# Altium PCB RdriveC1.PcbDoc (part 2 of 2)
Units mm, origin at the board's own origin, x right, y up, seen from the top; angles counter-clockwise.
Board outline 52.05 x 52.02 mm, 4 copper layers (Top Layer, S1, GND, Bottom Layer), stack 0.848 mm thick; 109 components, 86 nets, 393 pads, 206 vias.
Unrouted connection lines stored in the file: 2.
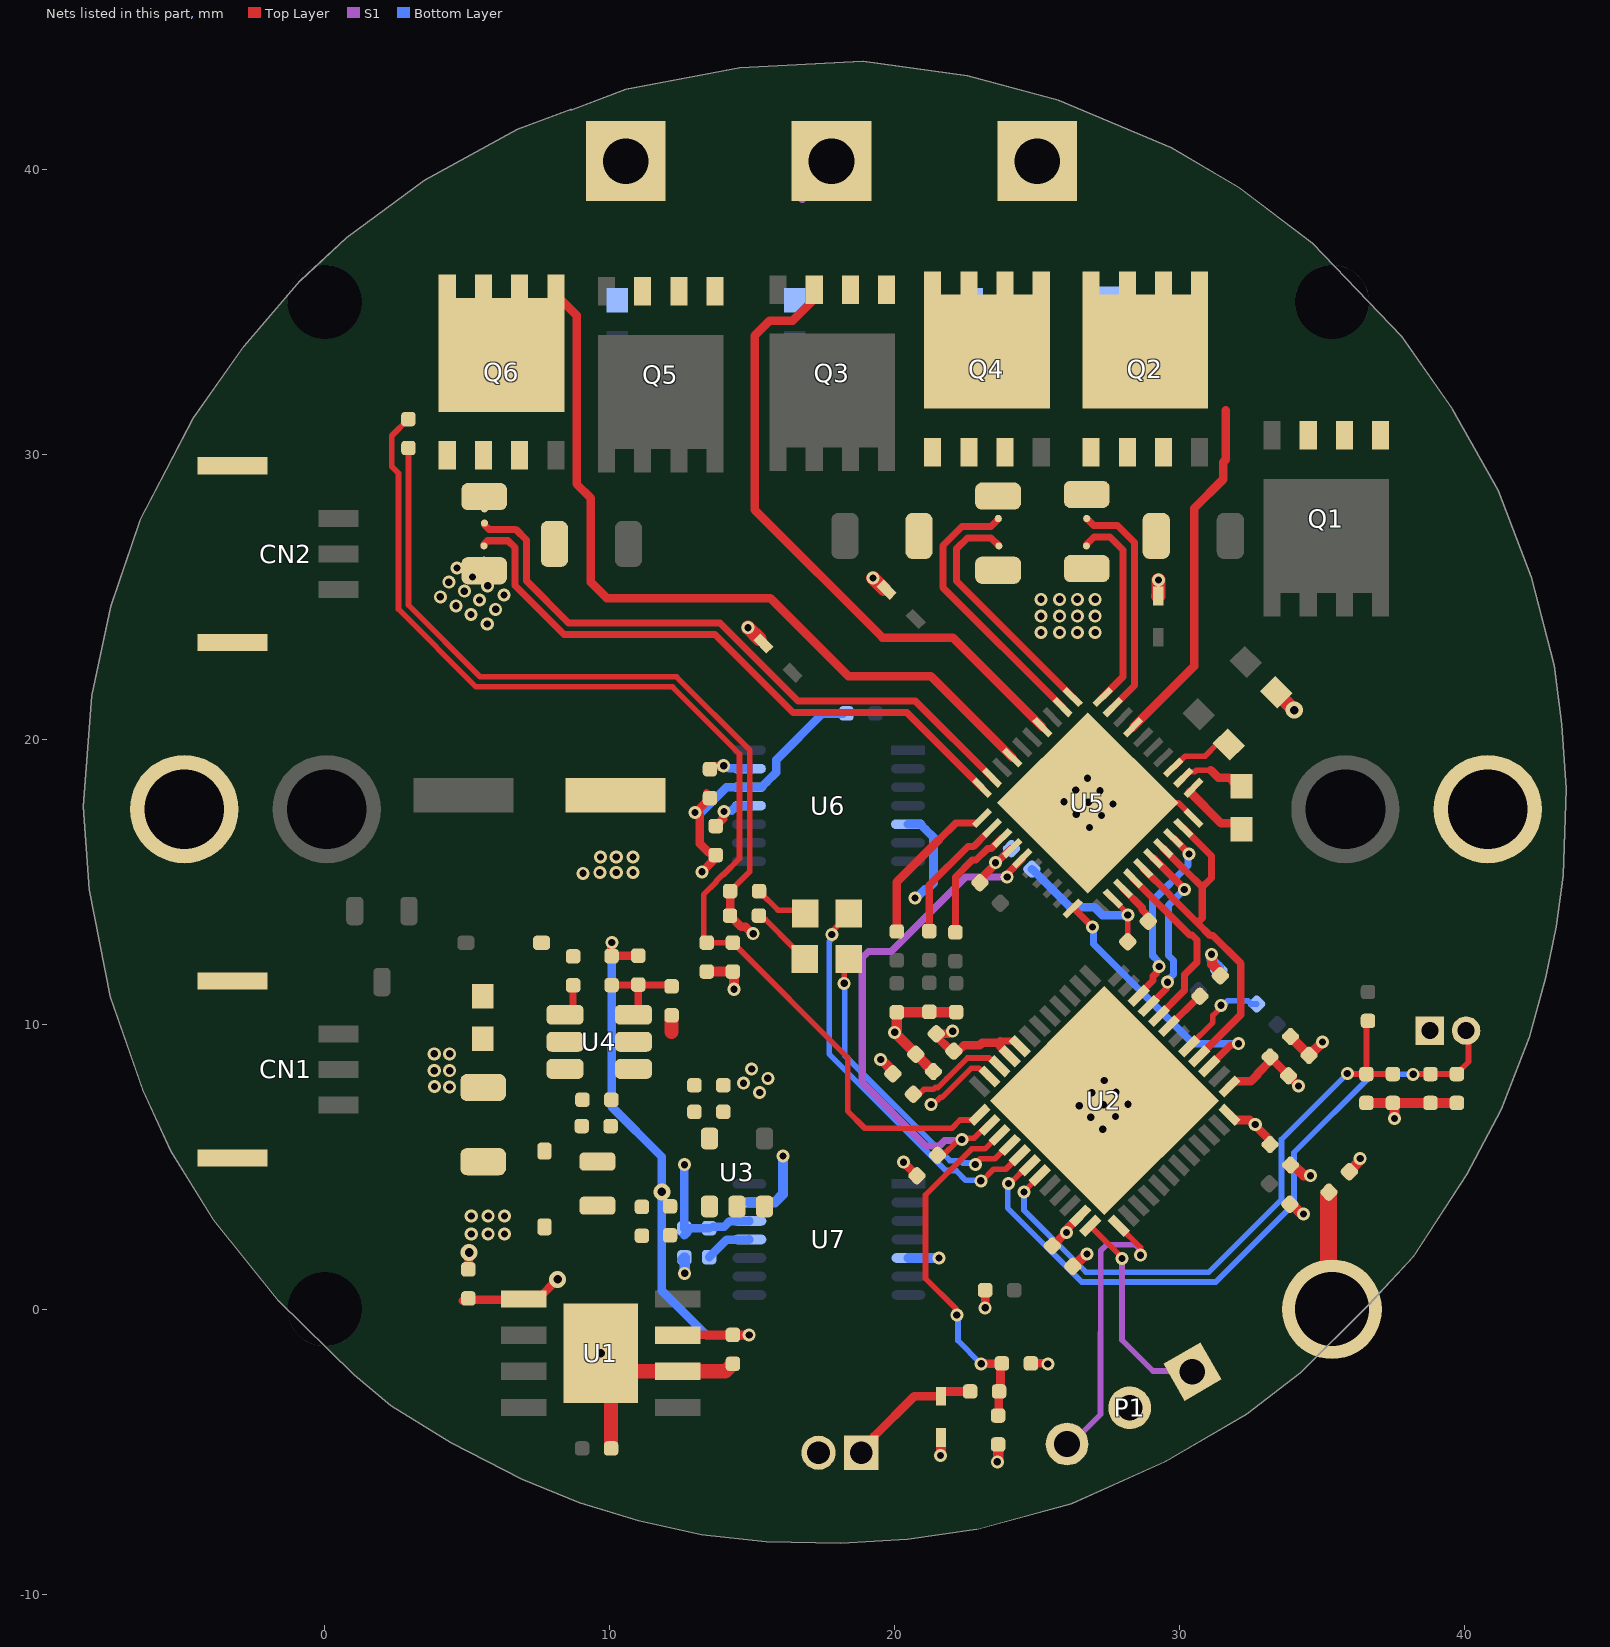
[diagram p4: the nets of this part, all layers, seen from the top]

## Via types
v1: diameter 0.457, hole 0.254, Top Layer to Bottom Layer, tented both sides, 201 vias
v2: diameter 0.6, hole 0.3, Top Layer to Bottom Layer, 4 vias
v3: diameter 0.6, hole 0.3, Top Layer to Bottom Layer, tented both sides, 1 vias

## Nets (pads, with @x,y where several pads share a name; then routed paths per layer and width w, separated by ;. In a path a pad name is that pad's centre, name@x,y a point inside that pad or via, vN(x,y) a via of type N, cw(c..) or ccw(c..) an arc to the next point about the centre after c; other vN are vias at no path point) (continued)
GND: C1.2 C2.2 C3.2 C4.1 C5.2 C6.2 C7.1 C11.1 C12.1 C14.2 C15.2 C16.1 C24.1 C25.1 C26.2 C27.2 C28.1 C29.2 C30.1 C31.1 C32.2 C37.2 C38.1 C39.1 D1.1 D3.2 P1.2 P3.2 R1.2 R6.2 R11.2 R15.2 R22.2 R29.1 R36.1 R37.2 R38.1 R39.2 U1.2 U1.9 U2.49 U3.2 U4.2 U5.32 U6.5 U6.13 U7.5 U7.13 | length 41.7
  Top Layer w0.2: U5.32@27.664,14.416 27.664,14.402 28.19,13.876 v1(28.19,13.836) v1(28.19,13.836) C24.1@28.189,12.901 ; C24.1@28.188,12.9 C24.1@28.189,12.901
  Top Layer w0.3: C3.2@5.051,1.395 5.053,1.398 5.053,1.976 v3(5.068,1.991) ; C2.2@13.521,18.956 13.625,19.06 13.875,19.06 v1@13.923,19.107
  Top Layer w0.36: C27.2@13.408,11.85 R37.2@14.323,11.85 14.365,11.809 v1(14.365,11.231) ; v1@19.533,8.766 19.94,8.358 R15.2@19.94,8.264 ; C5.2@21.365,8.342 21.359,8.342 20.751,8.949 C6.2@20.745,8.949 20.745,8.963 20.004,9.704 v1(20.004,9.719) 20.081,9.795 C31.1@20.081,10.421 20.084,10.425 22.156,10.425 C28.1@22.16,10.429 ; v1@21.63,-5.147 21.632,-5.144 21.632,-4.507 D3.2@21.635,-4.505 ; v1@23.638,-5.361 C37.2@23.638,-4.748 ; C7.1@26.258,1.503 26.297,1.503 26.732,1.938 v1(26.759,1.938) ; v1(31.124,12.456) 31.143,12.437 31.143,12.105 31.437,11.811 C16.1@31.437,11.706 ; R11.2@33.874,3.686 33.95,3.686 v1@34.264,3.372 ; C4.1@33.897,9.573 33.897,9.567 34.547,8.917 C15.2@34.547,8.911 34.555,8.911 v1(35.021,9.377) ; C14.2@33.99,5.05 34.002,5.062 34.359,4.705 34.581,4.705 v1(34.599,4.687) ; R29.1@36.003,4.884 v1@36.318,5.198 ; C26.2@36.563,7.239 R36.1@37.489,7.239 ; v1(37.549,6.692) 37.549,7.179 R36.1@37.489,7.239 ; C29.2@39.736,7.239 R36.1@37.489,7.239
  Top Layer w0.5: v2(9.687,-1.545) U1.9@10.051,-1.908 ; R38.1@10.051,-4.888 U1.9@10.051,-1.908 ; 12.171,9.741 12.171,10.313 R6.2@12.175,10.317 R6.2@12.179,10.313 ; C1.2@14.327,-1.915 14.062,-2.18 U1.2@12.387,-2.18 10.322,-2.18 U1.9@10.051,-1.908 ; C24.1@28.182,12.9 C24.1@28.188,12.9
  Bottom Layer w0.3: v1@14.099,19.022 14.142,19.022 14.183,18.98 14.883,18.98 U6.13@14.89,18.972 ; U6.5@20.473,17.022 20.908,17.022 21.087,16.842 21.091,16.842 21.367,16.567 21.367,14.953 21.155,14.741 21.067,14.741 20.758,14.433 v1(20.716,14.433) ; C25.1@24.821,15.449 26.154,14.116 27.011,14.116 27.29,13.836 v1(28.19,13.836)
  Bottom Layer w0.36: C32.2@12.547,1.743 C32.2@12.621,1.817 12.632,1.806 v1(12.632,1.259) ; U7.13@14.905,3.749 14.915,3.758 15.805,3.758 16.082,4.035 v1@16.082,5.373 ; U7.5@20.488,1.799 v1(21.565,1.799) ; v1(31.124,12.456) 31.124,12.265 31.385,12.005 R1.2@31.385,11.9
  other v1: 23.608,-5.358 21.613,-5.137 5.143,2.641 5.735,2.641 6.31,2.641 5.143,3.27 5.735,3.27 6.31,3.27 34.355,3.345 36.344,5.289 16.084,5.375 27.309,6.317 26.89,6.736 27.754,6.762 26.483,7.142 27.335,7.181 28.19,7.197 26.924,7.597 27.771,7.616 27.364,8.023 19.513,8.766 14.001,19.076
LED1_1: LED1.C U2.28 | length 11.1
  Top Layer w0.2: v1(18.234,11.439) 18.234,12.14 LED1.C@18.388,12.294 ; v1(22.835,5.08) 22.835,5.107 23.007,5.279 23.523,5.279 24.005,5.761 U2.28@24.04,5.761
  Bottom Layer w0.2: v1@18.253,11.42 18.253,8.904 21.942,5.215 22.304,5.215 22.39,5.129 22.786,5.129 v1(22.835,5.08)
LED2_1: LED2.C U2.29 | length 14.1
  Top Layer w0.2: v1(17.799,13.155) 17.848,13.205 17.848,13.311 18.401,13.864 LED2.C@18.401,13.889 ; v1(23.03,4.505) 23.066,4.505 23.475,4.914 23.901,4.914 U2.29@24.394,5.407
  Bottom Layer w0.2: v1(17.799,13.155) 17.75,13.106 17.75,12.955 17.705,12.91 17.705,8.957 21.797,4.865 22.159,4.865 22.501,4.523 23.012,4.523 v1(23.03,4.505)
M1_GND: pad.1@35.355,0 R29.2 | length 5.7
  Top Layer w0.6: R29.2@35.236,3.962 35.236,0.665 34.571,0 pad.1@35.355,0 pad.1@35.825,0.469
MOTOR1_1: U2.8 U5.34 | length 6.4
  Top Layer w0.25: U5.34@28.371,15.123 30.363,13.13 30.444,13.13 30.621,12.954 30.621,12.176 30.183,11.738 30.183,11.196 U2.8@29.279,10.292
MOTOR2_1: U2.9 U5.36 | length 6.3
  Top Layer w0.25: U2.9@28.926,10.646 29.541,11.261 29.541,11.441 v1(29.58,11.48) ; U5.36@29.078,15.83 29.099,15.83 30.17,14.76 v1(30.17,14.734)
  Bottom Layer w0.25: v1(29.58,11.48) 29.58,11.536 29.791,11.747 29.791,12.241 29.614,12.418 29.614,14.178 v1(30.17,14.734)
MOTOR3_1: U2.10 U5.38 | length 6.7
  Top Layer w0.25: U2.10@28.572,10.999 28.572,11.038 29.077,11.543 29.077,11.687 29.202,11.813 29.202,11.892 29.287,11.977 v1(29.287,12.033) ; U5.38@29.785,16.537 29.785,16.535 30.335,15.985 v1(30.335,15.982)
  Bottom Layer w0.25: v1(29.287,12.033) 29.248,12.073 29.248,12.219 29.06,12.407 29.06,14.336 30.301,15.577 30.301,15.948 v1(30.335,15.982)
MOTOR_ENABLE_1: U2.3 U5.30 | length 9.5
  Top Layer w0.25: U5.30@26.25,14.062 26.265,14.078 26.286,14.078 v1(26.947,13.417) ; U2.3@31.047,8.524 31.802,9.279 32.035,9.279 v1(32.075,9.319)
  Bottom Layer w0.25: v1(26.947,13.417) 26.987,13.377 26.987,12.819 30.488,9.319 v1(32.075,9.319)
MOTOR_FAULT_1: R31.1 U2.26 U5.25 | length 18.4
  Top Layer w0.2: R31.1@21.505,5.402 21.699,5.402 22.206,5.909 22.31,5.909 v1(22.36,5.958) 22.451,5.867 22.589,6.005 22.797,6.005 23.259,6.468 U2.26@23.333,6.468
  Top Layer w0.25: v1(23.955,15.169) 23.994,15.209 23.994,15.321 24.482,15.809 U5.25@24.482,15.83
  S1 w0.25: v1(22.36,5.958) 22.32,5.918 21.764,5.918 21.571,5.725 21.104,5.725 18.866,7.963 18.866,12.342 19.081,12.557 19.884,12.557 22.497,15.169 v1(23.955,15.169)
MOTOR_HIZ_1: U2.4 U5.35 U5.37 U5.39 | length 14.6
  Top Layer w0.25: U5.35@28.725,15.476 29.666,14.535 29.666,14.525 30.633,13.558 ; U5.37@29.432,16.184 29.432,16.174 30.206,15.399 30.216,15.399 30.801,14.814 ; U5.39@30.139,16.891 31.127,15.902 31.127,15.14 30.801,14.814 ; U2.4@30.693,8.878 32.152,10.336 32.152,12.14 31.181,13.111 31.08,13.111 30.633,13.558 ; 30.633,13.558 30.801,13.726 30.801,14.814
NetC8_1: C8.1 C10.1 D1.2 L1.1 U4.6
NetC8_2: C8.2 C10.2 U4.1
NetC9_2: C9.2 R4.2 R6.1 U4.3 | length 3.1
  Top Layer w0.25: R4.2@10.069,11.375 10.074,11.38 C9.2@11.005,11.38 ; U4.3@10.834,10.336 11.005,10.507 C9.2@11.005,11.38 ; C9.2@11.005,11.393 C9.2@11.005,11.38 ; R6.1@12.028,11.385 12.023,11.38 C9.2@11.005,11.38
NetC13_1: C13.1 D2.2 R10.2 U4.5
NetC17_2: C17.2 NT1.2 Q2.1 Q2.2 Q2.3 R28.2
NetC18_2: C18.2 NT3.2 Q4.1 Q4.2 Q4.3 R18.2
NetC19_2: C19.2 NT5.2 Q6.1 Q6.2 Q6.3 R19.2
NetC20_1: C20.1 U5.2 | length 2.5
  Top Layer w0.2: U5.2@30.139,18.658 30.344,18.863 30.542,18.863 30.594,18.915 31.103,18.915 ; C20.1@32.178,18.355 C20.1@32.361,18.538
  Top Layer w0.3: 31.103,18.915 31.361,18.658 31.744,18.658 31.974,18.428 C20.1@31.974,18.378
NetC20_2: C20.2 U5.1 | length 2.5
  Top Layer w0.2: U5.1@30.362,18.16 30.438,18.236 30.438,18.25 U5.1@30.492,18.305 ; C20.2@32.178,16.855 C20.2@32.424,16.61
  Top Layer w0.3: U5.1@30.362,18.16 31.462,17.06 C20.2@31.873,17.06
NetC21_1: C21.1 U5.3 | length 2.5
  Top Layer w0.2: U5.3@29.785,19.012 29.799,19.012 30.201,19.414 30.904,19.414 31.324,19.834 31.72,19.834 C21.1@31.732,19.821
  Top Layer w0.25: C21.1@31.623,20.008 31.732,20.008 31.734,20.008 C21.1@31.769,19.973
NetC24_2: C24.2 U5.33 | length 1.6
  Top Layer w0.25: U5.33@28.018,14.769 28.693,14.094 28.693,14.012 29.013,13.692 C24.2@29.013,13.547
NetC37_1: C37.1 R12.2 R13.1 U2.27 | length 12.8
  Top Layer w0.2: v1(22.187,-0.206) 22.138,-0.157 22.138,0.031 21.086,1.083 21.086,4.008 22.707,5.629 23.173,5.629 23.659,6.114 U2.27@23.687,6.114
  Top Layer w0.3: v1@23.044,-1.914 R12.2@23.758,-1.914 ; C37.1@23.638,-3.732 23.654,-3.715 23.654,-2.904 R13.1@23.67,-2.888 23.72,-2.838 23.72,-1.952 R12.2@23.758,-1.914 ; R12.2@23.769,-1.903 R12.2@23.758,-1.914
  Bottom Layer w0.2: v1@22.224,-0.219 22.224,-1.102 v1(23.04,-1.918)
NetCN1_4: CN1.4 CN1.5
NetCN2_4: CN2.4 CN2.5
NetD3_1: D3.1 P3.1 R13.2 | length 5
  Top Layer w0.3: P3.1@18.686,-5.061 18.807,-5.061 19.279,-4.588 19.279,-4.467 20.69,-3.057 D3.1@21.635,-3.057 21.635,-2.916 21.662,-2.888 R13.2@22.654,-2.888
NetLED1_A: LED1.A R7.2 | length 2.3
  Top Layer w0.2: R7.2@15.241,13.813 15.378,13.676 15.467,13.676 16.458,12.684 16.483,12.684 16.848,12.319 LED1.A@16.848,12.294
NetLED2_A: LED2.A R9.2 | length 1.9
  Top Layer w0.2: R9.2@15.244,14.673 15.91,14.007 16.743,14.007 LED2.A@16.861,13.889
NetR2_2: R2.2 U2.5 | length 3.3
  Top Layer w0.2: U2.5@30.34,9.232 31.174,10.066 31.174,10.308 31.463,10.596 v1(31.463,10.666)
  Bottom Layer w0.2: v1(31.463,10.666) 31.532,10.666 31.696,10.829 32.399,10.829 32.515,10.713 R2.2@32.709,10.713
NetR3_2: R3.2 U7.11 | length 1.7
  Bottom Layer w0.3: R3.2@13.49,1.827 14.104,2.441 14.897,2.441 U7.11@14.905,2.449
NetR10_1: R10.1 U4.4 | length 1.2
  Top Layer w0.25: U4.4@8.434,10.336 8.497,10.336 8.718,10.557 R10.1@8.718,11.368
NetR15_1: R15.1 U2.22 | length 3.7
  Top Layer w0.2: R15.1@20.659,7.545 20.853,7.545 21.024,7.716 21.365,7.716 21.434,7.785 21.521,7.785 21.838,8.103 21.842,8.103 22.555,8.816 23.321,8.816 23.613,8.524 U2.22@23.687,8.524
NetR32_2: R32.2 U5.23 | length 4.1
  Top Layer w0.25: R32.2@22.136,13.23 22.136,15.174 22.726,15.763 22.86,15.763 23.273,16.176 23.393,16.176 23.754,16.537 U5.23@23.775,16.537
NetR35_2: R35.2 U5.22 | length 4.4
  Top Layer w0.25: R35.2@21.22,13.269 21.22,14.886 22.58,16.246 22.777,16.246 U5.22@23.227,16.696
NetR40_2: R40.2 U5.21 | length 5.4
  Top Layer w0.25: 21.548,16.46 22.148,17.06 U5.21@22.863,17.06
  Top Layer w0.3: R40.2@20.078,13.258 20.078,14.99 21.548,16.46
NetR41_2: R41.2 U6.11 | length 1.3
  Top Layer w0.3: R41.2@13.725,16.957 13.987,17.219 13.987,17.436 v1(14.017,17.466)
  Bottom Layer w0.3: 14.28,17.496 14.456,17.672 U6.11@14.89,17.672
nRST_1: C16.2 U2.7 | length 1.5
  Top Layer w0.25: U2.7@29.633,9.939 29.651,9.939 30.7,10.988 C16.2@30.719,10.988
PGND: C13.2 C22.2 C23.2 C33.1 C34.1 C35.1 C36.1 D6.2 D7.2 D8.2 NT2.2 NT4.2 NT6.2 P5.1 P6.1 R18.1 R19.1 R22.1 R28.1 U5.40 U5.41 | length 6.5
  Top Layer w0.2: U5.41@26.78,17.775 29.962,17.775 U5.40@30.492,17.244
  Top Layer w0.5: v1(14.86,23.922) D8.2@15.249,23.532 ; v1@19.241,25.668 D7.2@19.633,25.277 ; D6.2@29.255,25.034 29.266,25.046 v1@29.266,25.6 ; C22.2@33.393,21.658 34.022,21.028 v2@34.039,21.028
  other v1: 4.387,7.796 3.85,7.82 3.843,8.371 4.387,8.371 3.843,8.964 4.387,8.964 9.069,15.3 9.656,15.333 10.231,15.333 10.824,15.333 9.68,15.87 10.231,15.876 10.824,15.876 26.844,16.911 27.263,17.33 26.381,17.374 27.67,17.737 26.8,17.793 25.945,17.81 27.207,18.2 26.364,18.229 26.771,18.635 25.142,23.75 25.797,23.75 26.414,23.75 27.043,23.75 5.704,24.054 25.142,24.325 25.797,24.325 26.414,24.325 27.043,24.325 5.137,24.381 6,24.567 4.603,24.69 5.433,24.894 25.142,24.918 25.797,24.918 26.414,24.918 27.043,24.918 4.058,25.004 6.288,25.065 4.899,25.203 5.72,25.393 4.354,25.517 29.266,25.597 19.243,25.667 5.187,25.701 4.642,26.016
  other v2: 34.03,21.028
SH_A_1: A.1 Q1.1 Q1.2 Q1.3 Q2.5 U5.7 | length 15.1
  Top Layer w0.3: U5.7@28.371,20.426 30.515,22.57 30.515,28.108 31.541,29.134 31.541,29.733 31.623,29.815 31.623,31.555 ; Q2.5@28.806,33.608 Q2.5@30.656,31.758
SH_B_1: B.1 Q3.1 Q3.2 Q3.3 Q4.5 U5.14 | length 23.7
  Top Layer w0.3: Q3.3@17.159,35.433 16.425,34.699 15.617,34.699 15.088,34.17 15.088,28.061 19.577,23.572 20.724,23.572 20.729,23.568 22.048,23.568 U5.14@25.189,20.426
  S1 w0.3: B.1@16.755,38.984 17.808,40.037 B.1@17.808,40.299
SH_C_1: C.1 Q5.1 Q5.2 Q5.3 Q6.5 U5.17 | length 28.1
  Top Layer w0.3: Q6.5@8.111,35.816 8.111,35.616 8.318,35.408 8.84,34.887 8.84,28.967 9.343,28.464 9.343,25.515 9.898,24.96 15.638,24.96 18.376,22.222 20.165,22.222 20.169,22.218 21.276,22.218 U5.17@24.128,19.365
SN1_1: NT2.1 U5.10 | length 7
  Top Layer w0.25: NT2.1@26.734,26.841 27,27.107 27.564,27.107 28.022,26.648 28.022,22.198 U5.10@27.31,21.487
SN2_1: NT4.1 U5.11 | length 8.6
  Top Layer w0.25: NT4.1@23.639,26.823 23.391,27.071 22.555,27.071 22.177,26.692 22.177,25.56 U5.11@26.25,21.487
SN3_1: NT6.1 U5.20 | length 22
  Top Layer w0.25: NT6.1@5.588,26.793 5.588,26.848 5.714,26.974 6.437,26.974 6.677,26.734 6.677,25.401 8.393,23.685 13.703,23.685 16.441,20.947 19.637,20.947 19.641,20.943 20.43,20.943 U5.20@23.068,18.305
SP1_1: NT1.1 U5.9 | length 8.1
  Top Layer w0.25: NT1.1@26.745,27.755 26.994,27.507 27.829,27.507 28.422,26.914 28.422,21.892 U5.9@27.664,21.133
SP2_1: NT3.1 U5.12 | length 9.7
  Top Layer w0.25: NT3.1@23.65,27.736 23.385,27.471 22.821,27.471 22.369,27.471 21.703,26.805 21.703,25.326 U5.12@25.896,21.133
SP3_1: NT5.1 U5.19 | length 22.4
  Top Layer w0.25: NT5.1@5.606,27.591 5.606,27.528 5.76,27.374 6.701,27.374 7.077,26.998 7.077,25.566 8.558,24.085 13.869,24.085 16.607,21.347 19.803,21.347 19.807,21.343 20.737,21.343 U5.19@23.421,18.658
SWCLK_1: P1.3 U2.37 | length 10.5
  Top Layer w0.2: U2.37@27.865,2.932 28.631,2.166 v1(28.631,1.897)
  S1 w0.2: P1.3@26.03,-4.708 26.214,-4.708 27.23,-3.692 27.23,-0.82 27.237,-0.813 27.237,2.058 27.438,2.259 28.465,2.259 28.582,2.142 28.582,1.946 v1(28.631,1.897)
SWDIO_1: P1.1 U2.36 | length 7.4
  Top Layer w0.2: U2.36@26.869,2.932 26.869,2.926 27.985,1.81 v1(27.985,1.781)
  S1 w0.2: v1(27.985,1.781) 27.985,-1.082 29.071,-2.168 P1.1@30.43,-2.168
VBAT_SENSE_1: C26.1 R33.1 R36.2 U2.31 | length 21.3
  Top Layer w0.2: v1(24.545,4.116) 24.545,4.13 25.101,4.686 U2.31@25.101,4.7 ; v1@35.867,8.255 C26.1@36.563,8.255 R36.2@37.489,8.255 ; C26.1@36.563,8.255 36.564,10.064 R33.1@36.618,10.118
  Bottom Layer w0.2: v1@24.511,4.075 24.545,4.04 24.545,3.475 26.718,1.302 31.033,1.302 33.585,3.854 33.585,5.961 v1(35.894,8.27)
VCC: C2.1 C3.1 C4.2 C5.1 C6.1 C7.2 C14.1 C15.1 C25.2 C32.1 C38.2 C39.2 P2.1 R3.1 R5.1 R7.1 R8.1 R9.1 R12.1 R30.2 R31.2 R34.2 R41.1 U1.5 U2.1 U2.20 U2.21 U2.23 U2.35 U2.48 U3.5 U5.24 U6.12 U7.12 | length 64.1
  Top Layer w0.2: R34.2@2.936,30.228 2.936,24.717 5.458,22.195 12.35,22.195 14.915,19.63 14.915,15.36 R9.1@14.228,14.673 ; C2.1@13.399,18.16 13.399,18.061 C2.1@13.521,17.94 ; v1(21.285,7.183) 21.354,7.183 21.606,7.435 21.669,7.435 22.697,8.462 22.968,8.462 23.259,8.171 U2.23@23.333,8.171
  Top Layer w0.25: v1(23.54,15.673) 23.58,15.712 23.636,15.712 24.107,16.184 U5.24@24.128,16.184 ; 23.644,9.35 23.705,9.411 24.214,9.411 U2.20@24.394,9.232
  Top Layer w0.3: C3.1@4.853,0.296 4.885,0.328 6.955,0.328 U1.5@6.987,0.36 7.483,0.36 v2(8.172,1.05) ; v1(12.996,17.432) 13.014,17.432 C2.1@13.521,17.94 ; v1@13.145,17.368 13.161,17.353 13.161,16.343 13.459,16.045 13.621,16.045 R41.1@13.725,15.941 13.621,15.837 13.621,15.732 v1(13.24,15.351) ; R9.1@14.228,14.673 14.226,14.672 14.226,13.815 R7.1@14.225,13.813 14.617,13.42 14.775,13.42 15.004,13.192 v1@15.11,13.192 ; v1(20.31,5.161) 20.31,5.159 R31.2@20.786,4.683 ; C6.1@21.423,9.627 21.99,9.06 C5.1@22.083,9.06 22.23,9.06 22.429,9.259 22.989,9.259 23.08,9.35 23.644,9.35 ; C6.1@21.464,9.667 21.908,9.667 21.998,9.757 v1(22.04,9.757) ; R30.2@22.997,14.969 22.997,15.087 23.54,15.63 v1(23.54,15.673) ; v1(23.182,0.049) R5.1@23.182,0.668 ; 23.705,9.411 23.705,9.217 24.04,8.881 U2.21@24.04,8.878 ; R12.1@24.785,-1.903 v1@25.402,-1.903 ; C7.2@25.54,2.221 25.552,2.221 26.022,2.691 v1(26.034,2.691) 26.065,2.721 26.065,2.832 26.515,3.282 U2.35@26.515,3.286 ; U2.48@31.754,6.821 31.758,6.821 31.937,6.642 32.465,6.642 33.179,5.927 C14.1@33.179,5.78 ; U2.1@31.754,7.817 31.934,7.997 32.506,7.997 32.755,8.246 32.755,8.283 33.179,8.707 C4.2@33.179,8.848 ; C4.2@33.179,8.854 C4.2@33.179,8.848 ; v1(34.182,7.833) 33.829,8.187 C15.1@33.829,8.192 33.829,8.199 C4.2@33.179,8.848
  Bottom Layer w0.25: v1(23.54,15.673) 23.574,15.673 24.068,16.168 C25.2@24.102,16.168
  Bottom Layer w0.3: C32.1@12.617,2.588 C32.1@12.725,2.696 ; C32.1@12.621,2.833 12.621,5.071 v1(12.623,5.073) ; C32.1@12.626,2.838 13.485,2.838 R3.1@13.49,2.843 ; v1@13.145,17.368 14.091,18.314 14.883,18.314 U6.12@14.89,18.322 15.325,18.322 15.505,18.502 15.509,18.502 15.846,18.838 15.846,19.281 17.47,20.906 R8.1@18.206,20.906 ; R3.1@13.634,2.888 14.015,2.888 14.217,3.091 14.897,3.091 U7.12@14.905,3.099
  other v1: 25.379,-1.924 32.661,6.482 15.266,7.606 14.698,7.934 15.553,8.105 14.986,8.432 15.038,13.18
VCC_5V: C1.1 C9.1 C11.2 C12.2 L1.2 R4.1 U1.3 U3.1 U3.3 | length 20.6
  Top Layer w0.3: v1(10.076,12.868) 10.076,12.398 10.078,12.4 10.996,12.4 C9.1@11.005,12.409 ; U1.3@12.387,-0.91 12.393,-0.904 14.321,-0.904 C1.1@14.327,-0.899 14.332,-0.903 14.891,-0.903 v1(14.896,-0.908)
  Bottom Layer w0.3: v1(10.076,12.868) 10.076,7.104 11.833,5.347 v2(11.833,4.116) 11.833,0.65 13.391,-0.908 v1(14.896,-0.908)
VTEMP_FET_1: C27.1 R34.1 R37.1 U2.25 | length 41.9
  Top Layer w0.2: R34.1@2.936,31.244 2.35,30.658 2.35,29.578 2.586,29.342 2.586,26.337 2.586,24.572 5.313,21.845 12.205,21.845 14.558,19.492 14.558,15.818 13.987,15.247 13.96,15.247 13.739,15.026 13.739,15 13.298,14.558 13.298,12.976 C27.1@13.408,12.866 R37.1@14.323,12.866 18.354,8.836 18.354,6.955 18.954,6.355 22.012,6.355 22.299,6.642 22.726,6.642 22.906,6.821 U2.25@22.98,6.821
VTEMP_MOT_1: C29.1 P2.2 R39.1 U2.30 | length 24.5
  Top Layer w0.2: v1(24.001,4.412) 24.053,4.412 24.695,5.053 U2.30@24.748,5.053 ; v1@38.275,8.255 R39.1@38.812,8.255 C29.1@39.736,8.255 39.736,8.269 40.148,8.681 40.148,9.692 P2.2@40.061,9.779
  Bottom Layer w0.2: v1@23.969,4.425 23.969,3.556 26.573,0.952 31.275,0.952 34.022,3.699 34.022,5.495 36.77,8.243 v1(38.203,8.243)
pads on no net: U2.16 U2.24 U3.4 U5.31 U6.6 U6.7 U6.8 U6.9 U6.10 U6.14 U7.6 U7.7 U7.8 U7.9 U7.10 U7.14

## Polygon pours and split planes (outlines as drawn)
DCBUS on Top Layer "NONET_L01_P-001" (solid, pour order 127): 4.048,15.982 -1.164,15.982 -1.763,16.581 -1.763,18.376 -0.198,19.942 6.25,19.942 6.466,19.726 6.466,15.096 5.718,14.349 5.681,14.349
DCBUS on Top Layer "NONET_L01_P-001" (solid, pour order 118): 4.048,15.982 4.048,12.429 4.248,12.23 5.469,12.23 5.718,12.479 5.718,14.349 6.276,14.906 6.276,15.885 5.344,16.817 4.609,16.081 3.998,16.081
GND on Top Layer "NONET_L01_P-001" (solid, pour order 90): 4.841,6.398 6.362,6.398 6.555,6.206 6.555,3.967 6.897,3.624 7.926,3.624 8.129,3.421 8.129,3.163 8.333,2.96 14,2.96 14.16,3.12 14.16,3.853 14.256,3.949 14.664,3.949 14.783,3.83 14.783,2.95 14.963,2.771 16.495,2.771 16.624,2.901 16.624,8.467 15.825,9.267 13.445,9.267 13.263,9.085 13.263,6.758 13.093,6.587 12.307,6.587 12.218,6.676 12.218,8.751 11.996,8.974 10.187,8.974 10.009,9.152 10.009,9.633 10.224,9.848 16.517,9.848 17.547,8.818 17.547,2.214 17.199,1.866 6.778,1.866 6.541,2.103 4.732,2.103 4.421,2.414 4.421,6.165 4.658,6.402 5.288,6.402
PGND on Top Layer "NONET_L01_P-001" (solid, pour order 116): 4.619,9.994 3.745,9.994 3.52,9.769 3.52,7.475 4.045,6.95 4.677,6.95 4.677,9.936
PGND on Top Layer "NONET_L01_P-001" (solid, pour order 107): 7.833,14.33 8.002,14.16 11.601,14.16 11.862,14.422 11.862,19.727 11.678,19.912 8.049,19.912 7.833,19.696
PGND on Top Layer "NONET_L01_P-001" (solid, pour order 104): 4.76,27.041 6.533,27.041 6.789,26.784 6.789,24.042 6.488,23.741 4.827,23.741 3.578,24.989 3.578,26.673 3.957,27.052 4.894,27.052
NetC19_2 on Top Layer "NONET_L01_P-001" (solid, pour order 103): 7.181,30.868 7.5,30.549 7.5,28.847 8.563,27.784 8.563,26.136 7.5,26.136 6.33,27.306 4.044,27.306 3.725,27.625 3.725,30.562 4.031,30.868
DCBUS on Top Layer "NONET_L01_P-001" (solid, pour order 102): 10.165,26.213 10.165,30.391 10.642,30.869 13.123,30.869 13.972,30.02 13.972,26.412 13.627,26.067 10.39,26.067 10.178,26.28
PGND on Top Layer "NONET_L01_P-001" (solid, pour order 101): 22.843,26.833 27.418,26.833 27.642,26.609 27.642,22.602 27.382,22.342 26.082,22.342 22.761,25.663 22.761,26.668 22.938,26.845
DCBUS on Top Layer "NONET_L01_P-001" (solid, pour order 100): 18.899,28.998 19.14,29.239 19.717,29.239 19.99,29.512 19.99,30.33 19.728,30.592 15.878,30.592 15.637,30.351 15.637,28.641 17.808,26.47 18.899,26.47
NetC18_2 on Top Layer "NONET_L01_P-001" (solid, pour order 99): 20.379,26.582 20.379,28.735 20.58,28.937 20.58,30.498 20.971,30.889 24.169,30.889 24.622,30.435 24.622,29.252 24.874,29 24.874,27.463 24.748,27.338 22.469,27.338 21.361,26.229 20.706,26.229 20.706,26.267 20.391,26.582
NetC17_2 on Top Layer "NONET_L01_P-001" (solid, pour order 98): 25.53,28.979 26.014,29.463 26.014,30.833 26.36,31.179 29.75,31.179 30.013,30.916 30.013,26.723 29.57,26.28 28.892,26.28 28.602,26.571 28.602,27.332 28.297,27.637 25.793,27.637 25.516,27.913 25.53,27.927 25.53,28.315
DCBUS on Top Layer "NONET_L01_P-001" (solid, pour order 97): 31.491,23.322 31.491,27.885 31.749,28.143 33.458,28.143 33.678,27.923 33.678,24.097 33.006,23.424 31.593,23.424
DCBUS on Top Layer "NONET_L01_P-001" (solid, pour order 96): 28.74,19.501 31.491,22.252 31.491,23.514 31.611,23.634 32.735,23.634 32.903,23.466 32.903,22.009 30.476,19.582 29.817,19.582 29.269,19.035 29.113,19.035 28.734,19.414 28.734,19.514
SH_A_1 on Top Layer "NONET_L01_P-001" (solid, pour order 95): 26.571,31.654 26.571,36.695 25.673,37.593 22.441,37.593 21.869,38.165 21.869,41.447 22.647,42.225 25.696,42.225 25.953,41.968 26.571,41.968 27.33,41.21 28.485,41.21 29.08,40.615 29.721,40.615 30.457,39.88 30.783,39.88 31.728,38.935 31.728,34.918 34.063,32.584 37.426,32.584 37.889,32.121 37.889,30.02 37.656,29.787 34.12,29.787 33.864,30.044 33.864,31.036 33.572,31.327 31.227,31.327 30.912,31.642 26.641,31.642 26.618,31.619
SH_B_1 on Top Layer "NONET_L01_P-001" (solid, pour order 94): 16.874,36.337 16.396,36.814 15.399,36.814 15.047,37.166 15.047,41.716 15.657,42.325 20.368,42.325 20.99,41.703 20.99,37.404 21.397,36.997 25.373,36.997 25.569,36.8 25.569,31.729 25.429,31.589 20.582,31.589 20.4,31.771 20.4,34.286 20.175,34.511 17.253,34.511 16.874,34.89 16.874,35.494
SH_C_1 on Top Layer "NONET_L01_P-001" (solid, pour order 93): 3.986,31.562 3.986,38.992 5.332,40.338 6.254,40.338 7.084,41.168 7.95,41.168 8.78,41.997 13.572,41.997 14.065,41.504 14.065,34.996 13.953,34.885 10.818,34.885 10.609,35.094 10.609,36.25 10.288,36.571 8.741,36.571 8.449,36.278 8.449,31.624 8.337,31.512 4.087,31.512 4.017,31.582
PGND on Top Layer "NONET_L01_P-001" (solid, pour order 92): 5.04,9.977 6.001,9.977 6.212,9.766 6.212,8.747 6.599,8.359 6.599,7.171 6.363,6.935 4.577,6.935 4.324,7.188 4.324,9.699 4.619,9.994 5.403,9.994
VCC on Top Layer "NONET_L01_P-001" (solid, pour order 89): 13.036,5.549 13.036,6.233 13.487,6.685 13.487,8.748 13.648,8.908 15.646,8.908 15.896,8.658 15.896,6.702 15.836,6.642 14.544,6.642 14.418,6.516 14.418,5.462 14.305,5.35 13.226,5.35 13.027,5.549
VCC_5V on Top Layer "NONET_L01_P-001" (solid, pour order 88): 13.549,4.471 15.898,4.471 16.048,4.321 16.048,3.218 15.87,3.04 15.213,3.04 15.052,3.202 15.052,4.09 15.068,4.106 13.981,4.106 13.782,3.907 13.636,4.052 13.13,4.052
VCC_5V on Top Layer "NONET_L01_P-001" (solid, pour order 87): 8.635,3.203 12.687,3.203 12.851,3.04 13.897,3.04 13.976,3.118 13.954,3.139 13.954,4.065 13.549,4.471 11.22,4.471 10.899,4.151 8.82,4.151 8.635,3.965 8.635,3.317 8.763,3.189
NetC8_2 on Top Layer "NONET_L01_P-001" (solid, pour order 86): 9.774,6.209 9.774,8.618 9.929,8.773 11.463,8.773 11.633,8.603 11.633,6.294 11.548,6.209 9.805,6.209 9.743,6.27
NetC8_1 on Top Layer "NONET_L01_P-001" (solid, pour order 85): 7.845,8.781 9.231,8.781 9.441,8.572 9.441,5.93 9.541,5.829 9.549,5.837 10.44,5.837 10.587,5.689 10.587,4.713 10.308,4.434 7.326,4.434 7.078,4.682 7.078,8.347 7.519,8.788 9.03,8.788
NetC13_1 on Top Layer "NONET_L01_P-001" (solid, pour order 84): 5.468,10.378 6.079,10.378 6.577,9.88 6.577,9.127 6.771,8.932 9.078,8.932 9.258,9.112 9.258,9.681 9.108,9.831 7.677,9.831 7.483,10.026 7.483,11.471 7.857,11.845 9.078,11.845 9.288,12.055 9.288,13.456 9.1,13.643 6.899,13.643 6.577,13.321 6.577,12.482 5.783,11.688 5.176,11.688 5.004,11.516 5.004,10.67 5.311,10.363 5.326,10.378 5.581,10.378
PGND on S1 "NONET_L01_P-001" (solid, pour order 82): 42.827,12.757 41.579,11.509 33.651,11.509 31.802,13.358 31.802,17.224 31.046,17.98 29.589,17.98 29.589,21.538 31.522,23.471 42.079,23.471 42.827,22.723
PGND on S1 "NONET_L01_P-001" (solid, pour order 80): -1.748,17.674 -7.034,17.674 -7.389,18.029 -7.389,21.737 -7.389,24.183 -6.127,25.445 -6.127,27.457 -1.985,31.599 1.526,31.599 3.498,33.571 3.498,36.293 4.248,37.042 30.796,37.042 32.058,35.78 32.058,34.715 34.346,32.427 37.778,32.427 40.578,29.626 40.578,27.26 42.156,25.682 42.156,23.394 42.827,22.723 42.827,14.045 42.117,13.335 36.989,13.335 36.121,14.203 36.121,17.122 36.555,17.556 38.172,17.556 38.685,18.068 38.685,20.751 38.054,21.382 33.281,21.382 26.646,14.747 26.071,14.747 26.071,14.871 20.276,20.665 13.577,20.665 12.29,19.378 12.29,14.354 11.99,14.053 4.589,14.053 3.446,15.197 3.446,16.581 2.453,17.573 -1.819,17.573 -1.97,17.724
GND on S1 "NONET_L01_P-001" (solid, pour order 113): 3.207,-3.537 3.207,-2.561 4.448,-1.32 4.448,6.348 4.506,6.407 7.025,6.407 7.533,6.914 7.533,8.766 8.737,9.969 8.737,11.832 9.732,12.828 12.157,12.828 13.084,13.755 13.084,18.844 14.307,20.067 19.894,20.067 25.826,14.135 27.043,14.135 29.447,16.539 30.233,16.539 31.019,15.753 31.019,13.16 33.753,10.426 41.798,10.426 42.207,10.018 42.207,8.918 41.5,8.211 41.5,7.409 40.667,6.576 40.667,5.696 39.158,4.188 38.498,4.188 37.115,2.805 34.806,2.805 34.68,2.679 33.878,2.679 32.276,1.077 32.276,-3.433 31.993,-3.716 30.956,-3.716 29.777,-4.894 28.803,-4.894 27.609,-6.089 26.367,-6.089 25.519,-6.937 23.806,-6.937 23.24,-7.503 12.539,-7.503 11.691,-6.654 9.177,-6.654 8.25,-5.727 7.103,-5.727 5.61,-4.234 4.148,-4.234 3.206,-3.292 3.206,-2.836
PGND on S1 "NONET_L01_P-001" (solid, pour order 115): 3.446,15.197 3.446,7.434 3.789,7.091 6.484,7.091 6.521,7.128 6.521,13.541 6.484,14.457 6.484,15.158 3.485,15.158
DCBUS on Bottom Layer "NONET_L01_P-001" (solid, pour order 125): 0.096,19.453 -0.688,19.453 -1.701,18.44 -1.701,16.453 -0.942,15.693 7.483,15.693 8.562,16.772 5.871,19.463 0.143,19.463
PGND on Bottom Layer "NONET_L01_P-001" (solid, pour order 124): -7.373,21.768 -7.373,15.653 -6.558,14.838 -3.773,14.838 -2.993,15.618 -2.993,17.681 -2.569,18.105 -2.569,18.689 -5.648,21.768
DCBUS on Bottom Layer "NONET_L01_P-001" (solid, pour order 108): 0.186,20.073 5.832,20.073 9.04,23.28 9.04,33.456 9.788,34.205 27.979,34.205 28.318,33.866 28.318,30.979 27.966,30.626 15.552,30.626 13.146,28.22 13.146,21.356 8.477,16.686 0.355,16.686 0.058,16.983 0.058,19.912 0.251,20.105
PGND on Bottom Layer "NONET_L01_P-001" (solid, pour order 109): 28.974,35.377 28.974,31.057 31.269,28.761 36.527,28.761 36.972,28.316 36.972,21.256 38.478,19.751 38.478,18.566 37.564,17.652 36.429,17.652 36.14,17.364 36.14,13.744 36.972,12.913 42.18,12.913 43.094,13.826 43.094,22.244 42.057,23.281 42.057,25.576 40.477,27.156 40.477,29.032 37.416,32.093 34.232,32.093 31.401,34.924 31.401,36.552 31.106,36.552 30.183,37.475 28.924,36.216 28.924,35.08
DCBUS on Bottom Layer "NONET_L01_P-001" (solid, pour order 112): 28.268,31.31 28.268,30.87 30.905,28.233 35.844,28.233 36.305,27.773 36.305,18.417 35.593,17.706 35.614,17.685 35.614,12.808 35.133,12.327 32.83,12.327 30.905,14.252 30.905,22.101 25.233,27.773 25.233,31.938 27.2,31.938 27.472,32.21 28.289,31.393 28.289,31.289
PGND on Bottom Layer "NONET_L01_P-001" (solid, pour order 105): -3.76,18.155 -7.373,21.768 -7.373,24.283 -6.115,25.541 -6.115,27.681 -2.235,31.561 0.815,31.561 3.251,33.996 3.251,36.672 4.588,38.01 30.978,38.01 31.401,37.529 31.401,35.575 31.026,35.201 8.79,35.201 7.907,34.318 7.907,24.497 4.883,21.473 0.628,21.473 -0.656,20.189 -0.656,18.664 -1.165,18.155 -2.61,18.155
PGND on Bottom Solder "NONET_L01_P-001" (solid): 26.791,14.692 21.88,19.602 21.861,19.602 25.025,22.766 25.025,22.785 29.877,17.933 29.955,17.933 26.791,14.769 26.791,14.711
PGND on Bottom Solder "NONET_L01_P-001" (solid, pour order 111): 36.429,17.652 37.564,17.652 38.425,18.513 38.425,19.886 37.007,21.305 37.007,24.192 41.815,24.192 42.023,23.984 42.023,20.456 39.893,18.326 39.893,15.17 39.18,14.458 36.025,14.458 35.98,14.502 35.98,17.204
PGND on Bottom Paste "NONET_L01_P-001" (solid): 36.426,17.663 37.562,17.663 38.423,18.524 38.423,19.897 37.005,21.315 37.005,24.203 41.813,24.203 42.021,23.994 42.021,20.467 39.89,18.336 39.89,15.18 39.178,14.468 36.023,14.468 35.978,14.513 35.978,17.214
DCBUS on GND "NONET_L01_P-001" (solid, pour order 126): -2.533,15.587 -2.231,15.285 3.953,15.285 4.403,15.735 4.403,18.308 3.395,19.315 -1.596,19.315 -2.533,18.379
DCBUS on GND "NONET_L01_P-001" (solid, pour order 81): 2.291,17.461 -7.456,17.461 -7.456,21.542 -7.321,21.677 -7.321,24.274 -6.276,25.32 -6.276,27.377 -1.891,31.762 1.92,31.762 3.674,33.516 3.674,36.214 4.585,37.124 30.724,37.124 32.208,35.64 32.208,34.527 34.4,32.335 37.84,32.335 40.606,29.569 40.606,27.175 42.225,25.556 42.225,23.06 42.562,22.723 42.562,12.672 41.719,11.829 33.287,11.829 31.702,13.414 31.702,17.293 30.96,18.035 30.049,18.035 26.879,14.864 26.069,14.864 20.302,20.632 13.354,20.632 12.511,19.788 12.511,14.696 11.769,13.954 5.023,13.954 3.64,15.336 3.64,16.247 2.527,17.36 -2.498,17.36 -2.633,17.495
VCC on GND "NONET_L01_P-001" (solid, pour order 114): 3.287,-3.517 3.287,-2.541 4.527,-1.3 4.527,6.368 4.586,6.426 7.105,6.426 7.613,6.934 7.613,8.786 8.816,9.989 8.816,11.852 9.812,12.848 12.237,12.848 13.164,13.775 13.164,18.864 14.387,20.087 19.974,20.087 25.906,14.155 27.123,14.155 29.527,16.559 30.313,16.559 31.098,15.773 31.098,13.18 33.833,10.446 41.878,10.446 42.286,10.038 42.286,8.938 41.579,8.231 41.579,7.429 40.747,6.596 40.747,5.716 39.238,4.208 38.578,4.208 37.195,2.825 34.885,2.825 34.76,2.699 33.958,2.699 32.356,1.097 32.356,-3.413 32.073,-3.696 31.036,-3.696 29.857,-4.875 28.883,-4.875 27.689,-6.069 26.447,-6.069 25.599,-6.917 23.886,-6.917 23.32,-7.483 12.619,-7.483 11.771,-6.634 9.257,-6.634 8.33,-5.707 7.182,-5.707 5.69,-4.215 4.228,-4.215 3.285,-3.272 3.285,-2.816

## Other copper
Top Layer:
  rectangle net NetCN2_4: -4.474,22.535 -1.945,30.363
  rectangle net NetCN1_4: -4.451,4.395 -1.857,12.533
  text "L1" at -6.612,10.341 h2
S1:
  pour cut-out: 19.465,-0.253 19.465,4.827 16.096,4.827 16.096,-0.253
  pour cut-out: 19.457,14.886 19.457,19.966 16.088,19.966 16.088,14.886
  text "L2" at -6.612,10.341 h2
GND:
  pour cut-out: 19.489,-0.105 19.489,4.975 16.12,4.975 16.12,-0.105
  pour cut-out: 19.442,14.855 19.442,19.935 16.073,19.935 16.073,14.855
  text "L3" at -6.556,10.258 h2
Bottom Layer:
  text "L4" at -6.612,10.343 h2

## Silkscreen, mask and mechanical layers (free items; w line width, h text height)
Top Overlay:
  lines w0.1: -8.387,16.363 -8.449,19.8 -7.295,26.007 -4.11,31.774 ; 34.488,-1.962 39.597,3.644
  lines w0.254: 2.456,-0.026 cw(c-0.044,-0.026) 2.456,0.003 ; 2.5,35.355 cw(c0,35.355) 2.5,35.384 ; 37.839,35.289 cw(c35.339,35.289) 37.839,35.318 ; 37.882,0.023 cw(c35.382,0.023) 37.882,0.053
  text "24V" at -3.927,20.772 h1.8
  text "24V" at 38.673,20.714 h1.8
  text "+24" at -0.261,20.427 h1
  text "RdriveC1" at 10.978,19.986 h3
  text "+24" at 34.843,13.999 h1
  text "CAN-H" at 1.325,9.49 h1
  text "SDIO" at 28.808,-1.291 h1 r30
  text "SDCLK" at 24.276,-3.935 h1 r30
Bottom Overlay:
  text "MUZIXIAOWEN" at 24.162,26.787 h2.2
  text "Designed" at 24.163,24.713 h2.2
Drill Guide:
  pour cut-out: 10.126,-1.237 10.126,3.843 6.757,3.843 6.757,-1.237
Mechanical 1:
  circle w0.013: c35.355,0 r1.6
  circle w0.013: c0,0 r1.6
  circle w0.013: c35.355,35.355 r1.6
  circle w0.013: c0,35.355 r1.6
  lines w0.254: 43.674,17.68 cw(c17.674,17.765) 43.674,17.765

## Text inside footprints (layer, text, board x,y; h text height)
P5: Top Overlay "-" at -8.656,17.171 h1; Top Overlay "+" at 2.901,17.044 h1
P6: Top Overlay "-" at 44.548,17.932 h1 r180; Top Overlay "+" at 32.991,18.059 h1 r180